# EAGLE board synchronizer v1.0 (EAGLE 6.5.0)
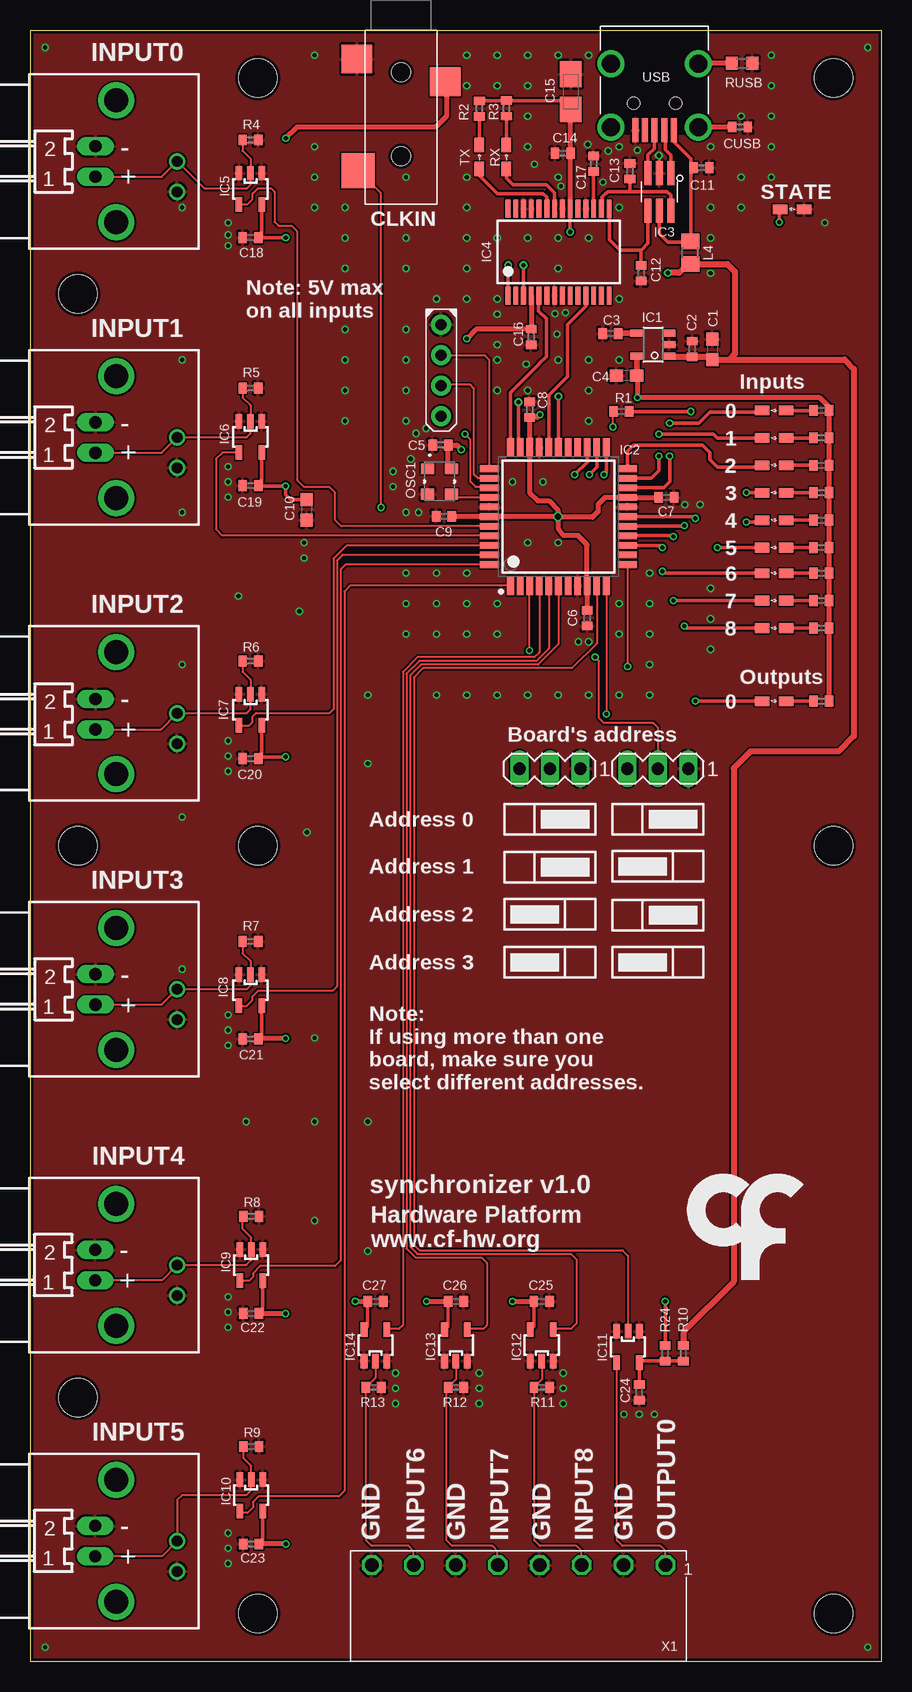
[diagram p0: board, top side]
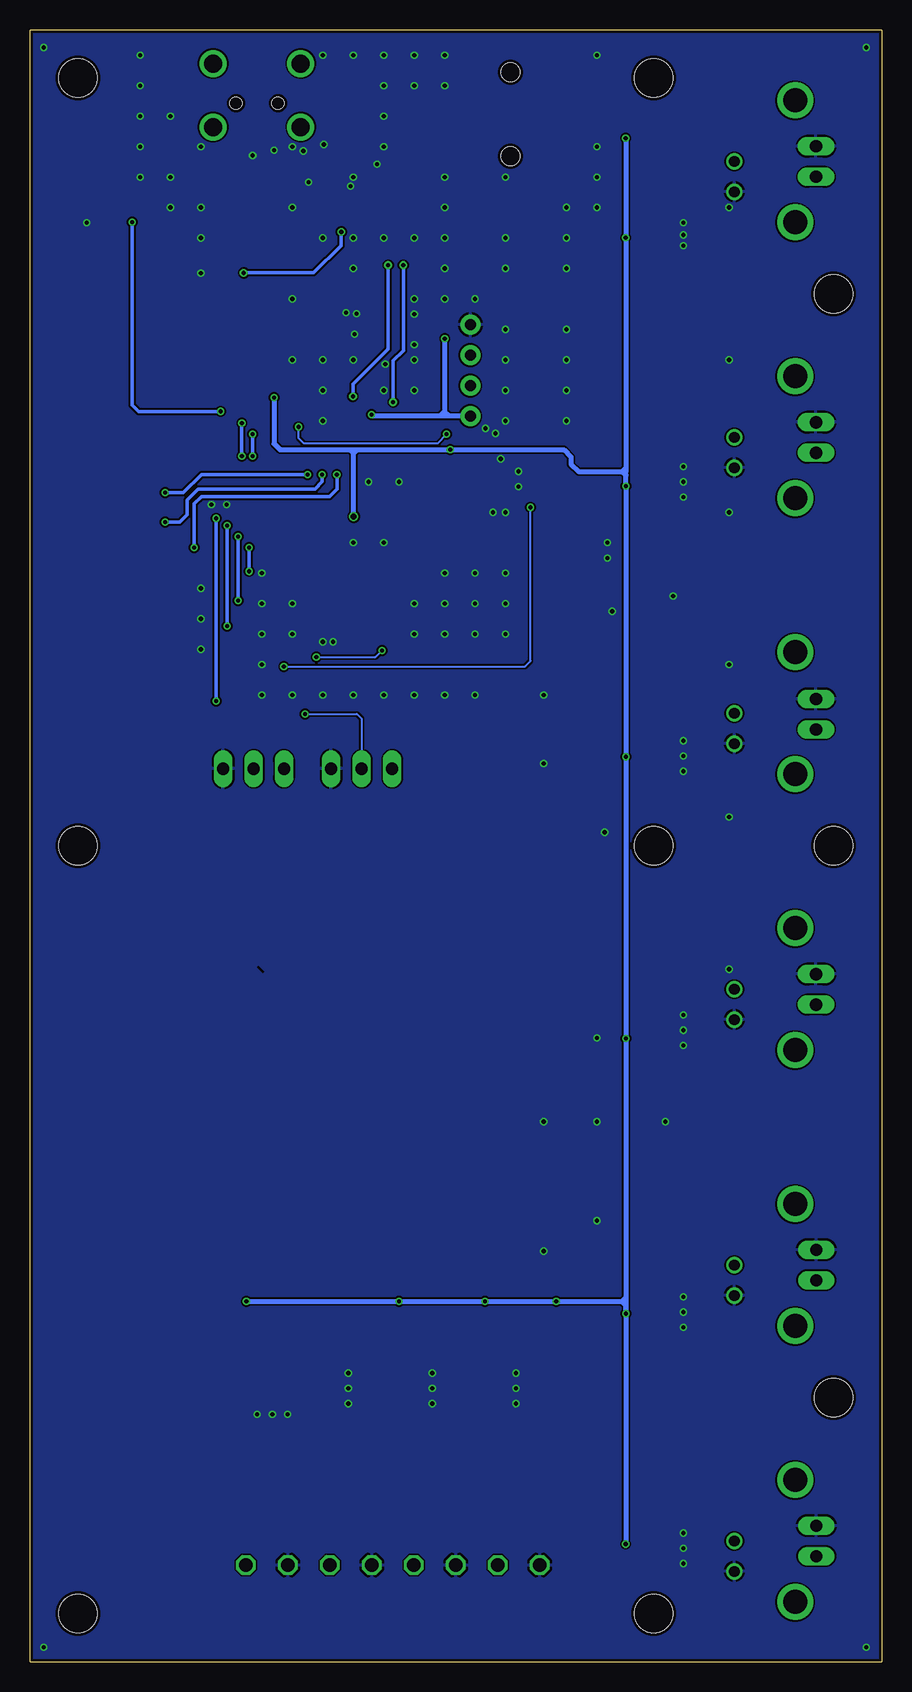
[diagram p1: board, bottom side, seen from below]

Size 71 x 136 mm. Coordinates in mm from the lower left corner, seen from the top.
Outline: 0,136 0,0 71,0 71,136 0,136
Copper layers (1*16): Top 0.018mm / dielectric 1.55mm / Bottom 0.018mm
Design rules "eC_2Layer_PClass6_BaseCopperO18_eCDefault *": minimum track width 0.15mm, minimum drill 0.35mm, track to track 0.15mm, track to pad 0.15mm, pad to pad 0.15mm, via to via 0.15mm, smd to smd 0mil, copper to edge 0.25mm, drill to drill 0.35mm, minimum pad ring 0.175mm, minimum via ring 0.125mm, stop-mask expansion 0mil, vias tented up to drill 0.45mm, thermal gap 0.2mm
Holes 3.2 mm at 4,114 4,68 67,132 67,68 19,132 19,68 4,22 67,4 19,4
bRestrict: 1 lines

## Footprints (pad centres in the part's own frame; a part is rotated, then mirrored left to right if it is on the bottom)
MA03-1 = drill 1.016 long: 1 -2.54,0; 2 0,0; 3 2.54,0
C0603 = smd 1.1 x 1: 1 -0.85,0; 2 0.85,0
C0402 = smd 0.7 x 0.9: 1 -0.65,0; 2 0.65,0
A/3216-18W = smd 2.15 x 1.8: + 1.475,0; - -1.475,0
35RASMT2BHNTRX = smd 2.4 x 2.55: 1 0.8,3.675; 5 -1.1,-3.675 | smd 2.9 x 2.75: 4 8.2,-3.575 | hole 1.6: 0,0; 7,0
BNC_RA = drill 0.9 pad 1.27: 1 0,-5.08; 2 -2.54,-5.08 | drill 2: P$1 -5.08,0; P$2 5.08,0
TSOT23-5 = smd 0.6 x 1.05: 1 -0.95,-1.354; 2 0,-1.354; 3 0.95,-1.354; 4 0.95,1.354; 5 -0.95,1.354
QFP80P1200X1200X120-44N = smd 1.55 x 0.55: 1 -5.75,4; 2 -5.75,3.2; 3 -5.75,2.4; 4 -5.75,1.6; 5 -5.75,0.8; 6 -5.75,0; 7 -5.75,-0.8; 8 -5.75,-1.6; 9 -5.75,-2.4; 10 -5.75,-3.2; 11 -5.75,-4; 23 5.75,-4; 24 5.75,-3.2; 25 5.75,-2.4; 26 5.75,-1.6; 27 5.75,-0.8; 28 5.75,0; 29 5.75,0.8; 30 5.75,1.6; 31 5.75,2.4; 32 5.75,3.2; 33 5.75,4 | smd 0.55 x 1.55: 12 -4,-5.75; 13 -3.2,-5.75; 14 -2.4,-5.75; 15 -1.6,-5.75; 16 -0.8,-5.75; 17 0,-5.75; 18 0.8,-5.75; 19 1.6,-5.75; 20 2.4,-5.75; 21 3.2,-5.75; 22 4,-5.75; 34 4,5.75; 35 3.2,5.75; 36 2.4,5.75; 37 1.6,5.75; 38 0.8,5.75; 39 0,5.75; 40 -0.8,5.75; 41 -1.6,5.75; 42 -2.4,5.75; 43 -3.2,5.75; 44 -4,5.75
SOT23-6L = smd 0.6 x 2: P$1 -0.95,-1.55; P$2 0,-1.55; P$3 0.95,-1.55; P$4 0.95,1.55; P$5 0,1.55; P$6 -0.95,1.55
SSOP28 = smd 0.4 x 1.5: 1 -4.225,-3.625; 2 -3.575,-3.625; 3 -2.925,-3.625; 4 -2.275,-3.625; 5 -1.625,-3.625; 6 -0.975,-3.625; 7 -0.325,-3.625; 8 0.325,-3.625; 9 0.975,-3.625; 10 1.625,-3.625; 11 2.275,-3.625; 12 2.925,-3.625; 13 3.575,-3.625; 14 4.225,-3.625; 15 4.225,3.625; 16 3.575,3.625; 17 2.925,3.625; 18 2.275,3.625; 19 1.625,3.625; 20 0.975,3.625; 21 0.325,3.625; 22 -0.325,3.625; 23 -0.975,3.625; 24 -1.625,3.625; 25 -2.275,3.625; 26 -2.925,3.625; 27 -3.575,3.625; 28 -4.225,3.625
SOT23-5 = smd 0.55 x 1.2: 1 -0.95,-1.3; 2 0,-1.3; 3 0.95,-1.3; 4 0.95,1.3; 5 -0.95,1.3
7395-02 = drill 1.016 long: 1 1.27,0; 2 -1.27,0
R0805 = smd 1.3 x 1.5: 1 -0.95,0; 2 0.95,0
OSCILLATOR_3.2X2.5 = smd 0.9 x 1.1: P$1 -1.05,-1; P$2 1.05,-1; P$3 1.05,1; P$4 -1.05,1
LED_HAND = smd 1.2 x 0.8: A -1,0; K 1,0
PDI_2.54_1X4 = drill 0.9 pad 1.676: P$1 -3.81,0; P$2 -1.27,0; P$3 1.27,0; P$4 3.81,0
R0402 = smd 0.7 x 0.9: 1 -0.65,0; 2 0.65,0
R0603 = smd 1 x 1.1: 1 -0.85,0; 2 0.85,0
240-0002-1 = smd 0.5 x 2: P$1 -1.6,8.65; P$2 -0.8,8.65; P$3 0,8.65; P$4 0.8,8.65; P$5 1.6,8.65 | drill 1.5: SHIELD_1 -3.65,3.1; SHIELD_2 3.65,3.1; SHIELD_3 3.65,8.4; SHIELD_4 -3.65,8.4 | hole 1: -1.75,6.4; 1.75,6.4
CON_3.5MM_1X8 = drill 1.1 octagon: P1 -12.25,0; P2 -8.75,0; P3 -5.25,0; P4 -1.75,0; P5 1.75,0; P6 5.25,0; P7 8.75,0; P8 12.25,0

## Placement (x,y rotation side)
A0  [MA03-1]  52.35,74.42 180 top
A1  [MA03-1]  43.35,74.42 180 top
C1  10uF  [C0603]  56.89,109.38 270 top
C2  100nF  [C0402]  55.21,109.41 270 top
C3  NA  [C0402]  48.41,110.7 0 top
C4  4.7uF  [C0603]  49.74,107.19 180 top
C5  100nF  [C0402]  34.22,101.4 180 top
C6  100nF  [C0402]  46.46,86.97 270 top
C7  100nF  [C0402]  53.05,97.04 0 top
C8  100nF  [C0402]  41.66,104.37 90 top
C9  330nF  [C0402]  34.52,95.46 180 top
C10  10uF  [C0603]  23.05,96.01 270 top
C11  100nF  [C0402]  56,124.52 0 top
C12  47pF  [C0402]  50.96,115.72 270 top
C13  47pF  [C0402]  50.02,124.23 90 top
C14  100nF  [C0402]  44.42,125.73 180 top
C15  4.7uF  [A/3216-18W]  45.09,130.85 270 top
C16  100nF  [C0402]  41.79,110.41 270 top
C17  100nF  [C0402]  47,124.86 90 top
C18  100nF  [C0402]  18.38,118.7 180 top
C19  100nF  [C0402]  18.38,98.02 180 top
C20  100nF  [C0402]  18.38,75.26 180 top
C21  100nF  [C0402]  18.38,51.9 180 top
C22  100nF  [C0402]  18.43,29.01 180 top
C23  100nF  [C0402]  18.43,9.8 180 top
C24  100nF  [C0402]  50.8,22.44 270 top
C25  100nF  [C0402]  42.67,30.01 0 top
C26  100nF  [C0402]  35.51,30.01 0 top
C27  100nF  [C0402]  28.8,30.01 0 top
CLKIN  [35RASMT2BHNTRX]  30.94,132.48 270 top
CTRL0.0  BNC  [BNC_RA]  7.2,125.05 90 top
CTRL0.1  BNC  [BNC_RA]  7.2,102.05 90 top
CTRL0.2  BNC  [BNC_RA]  7.2,79.05 90 top
CTRL0.3  BNC  [BNC_RA]  7.2,56.05 90 top
CTRL0.4  BNC  [BNC_RA]  7.2,33.05 90 top
CTRL0.5  BNC  [BNC_RA]  7.2,10.05 90 top
CUSB  4.7nF  [C0402]  59.2,127.91 0 top
IC1  TPS70933  [TSOT23-5]  51.95,109.77 90 top
IC2  ATXMEGAxxxA4U-AU  [QFP80P1200X1200X120-44N]  44.06,95.44 90 top
IC3  USBLC6-2SC6  [SOT23-6L]  52.48,122.5 180 top
IC4  FT232RL  [SSOP28]  44.07,117.49 0 top
IC5  SN74LVC1G240  [SOT23-5]  18.38,122.76 180 top
IC6  SN74LVC1G240  [SOT23-5]  18.38,102.09 180 top
IC7  SN74LVC1G240  [SOT23-5]  18.38,79.33 180 top
IC8  SN74LVC1G240  [SOT23-5]  18.38,55.96 180 top
IC9  SN74LVC1G240  [SOT23-5]  18.45,33.05 180 top
IC10  SN74LVC1G240  [SOT23-5]  18.45,13.86 180 top
IC11  SN74LVC1G240  [SOT23-5]  49.86,26.23 180 top
IC12  SN74LVC1G240  [SOT23-5]  42.67,26.36 0 top
IC13  SN74LVC1G240  [SOT23-5]  35.51,26.36 0 top
IC14  SN74LVC1G240  [SOT23-5]  28.8,26.36 0 top
IN0.0  [7395-02]  5.46,125.04 270 top
IN0.1  [7395-02]  5.46,102.02 270 top
IN0.2  [7395-02]  5.46,78.96 270 top
IN0.3  [7395-02]  5.46,56.02 270 top
IN0.4  [7395-02]  5.43,33.05 270 top
IN0.5  [7395-02]  5.43,10.05 270 top
L4  ???  [R0805]  55.05,117.43 90 top
OSC1  [OSCILLATOR_3.2X2.5]  34.14,98.37 270 top
OUT00  GREEN  [LED_HAND]  62.03,104.28 180 top
OUT01  GREEN  [LED_HAND]  62.03,102 180 top
OUT02  GREEN  [LED_HAND]  62.03,99.71 180 top
OUT03  GREEN  [LED_HAND]  62.03,97.43 180 top
OUT04  GREEN  [LED_HAND]  62.03,95.14 180 top
OUT05  GREEN  [LED_HAND]  62.03,92.85 180 top
OUT10  GREEN  [LED_HAND]  62.03,90.72 180 top
OUT11  GREEN  [LED_HAND]  62.03,88.43 180 top
OUT12  GREEN  [LED_HAND]  62.03,86.15 180 top
OUT13  GREEN  [LED_HAND]  62.03,80.05 180 top
PDI  PDI  [PDI_2.54_1X4]  34.28,107.63 270 top
R1  68  [R0402]  49.32,104.2 180 top
R2  2050  [R0402]  37.47,129.44 90 top
R3  680  [R0402]  39.72,129.46 90 top
R4  100k  [R0402]  18.38,126.83 0 top
R5  100k  [R0402]  18.38,106.15 0 top
R6  100k  [R0402]  18.38,83.39 0 top
R7  100k  [R0402]  18.38,60.02 0 top
R8  100k  [R0402]  18.45,37.11 0 top
R9  100k  [R0402]  18.45,17.92 0 top
R10  0  [R0402]  54.48,25.7 270 top
R11  100k  [R0402]  42.67,22.85 0 top
R12  100k  [R0402]  35.51,22.85 0 top
R13  100k  [R0402]  28.65,22.85 0 top
R14  68  [R0402]  65.99,104.28 0 top
R15  68  [R0402]  65.99,102 0 top
R16  68  [R0402]  65.99,99.71 0 top
R17  68  [R0402]  65.99,97.43 0 top
R18  68  [R0402]  65.99,95.14 0 top
R19  68  [R0402]  65.99,92.85 0 top
R20  68  [R0402]  65.99,90.72 0 top
R21  68  [R0402]  65.99,88.43 0 top
R22  68  [R0402]  65.99,86.15 0 top
R23  68  [R0402]  65.99,80.05 0 top
R24  0 NA  [R0402]  52.96,25.7 270 top
RUSB  1M  [R0603]  59.39,133.22 0 top
RX  GREEN  [LED_HAND]  39.72,125.41 270 top
STATE  GREEN  [LED_HAND]  63.55,121.05 0 top
TX  RED  [LED_HAND]  37.47,125.41 270 top
U$9  [LOGO_6]  57.96,37.56 0 top
USB  [240-0002-1]  52.08,136.31 180 top
X1  CON_3.5MM_1X8  [CON_3.5MM_1X8]  40.75,8.04 180 top

## Library data of the parts
A0 A1 = con-lstb; OC_FARNELL: unknown; OC_NEWARK: unknown
C1-C27 CUSB L4 R1-R24 RUSB = rcl
CLKIN CTRL0.0 CTRL0.1-CTRL0.5 PDI USB X1 = CNP-connectors
IC1 = CNP-ics 2
IC2 = xmega-a4
IC3 = CNP 2
IC4 = ftdichip; MPN: FT232RL; OC_FARNELL: 1146032; OC_NEWARK: 91K9918
IC5-IC14 = My_library 0v2
IN0.0 IN0.1-IN0.5 = con-molex; OC_FARNELL: 9731601; OC_NEWARK: unknown
OSC1 OUT00 OUT01-OUT05 OUT10-OUT13 RX STATE TX U$9 = CNP-miscellaneous

## Nets
A0: A0.2 IC2.3
A1: A1.2 IC2.11
CLK_SYNC: CLKIN.4 IC2.12
CTRL00: IC2.40 IC5.4
CTRL01: IC2.41 IC6.4
CTRL02: IC2.42 IC7.4
CTRL03: IC2.43 IC8.4
CTRL04: IC2.44 IC9.4
CTRL05: IC2.1 IC10.4
CTRL10: IC2.4 IC14.4
CTRL11: IC2.5 IC13.4
CTRL12: IC2.6 IC12.4
FT_CTS: IC2.29 IC4.11
FT_RTS: IC2.28 IC4.3
FT_RXD: IC2.33 IC4.5
FT_TXD: IC2.32 IC4.1
GND: A0.1 A1.1 C1.1 C2.1 C3.1 C4.2 C5.2 C6.2 C7.2 C8.2 C9.2 C10.2 C11.2 C12.2 C13.2 C14.2 C15.- C16.2 C17.2 C18.2 C19.2 C20.2 C21.2 C22.2 C23.2 C24.2 C25.2 C26.2 C27.2 CLKIN.5 CTRL0.0.2 CTRL0.1.2 CTRL0.2.2 CTRL0.3.2 CTRL0.4.2 CTRL0.5.2 CUSB.2 IC1.2 IC2.8 IC2.18 IC2.30 IC2.38 IC3.P$2 IC4.7 IC4.18 IC4.21 IC4.25 IC4.26 IC5.1 IC5.3 IC6.1 IC6.3 IC7.1 IC7.3 IC8.1 IC8.3 IC9.1 IC9.3 IC10.1 IC10.3 IC11.1 IC11.3 IC12.1 IC12.3 IC13.1 IC13.3 IC14.1 IC14.3 IN0.0.2 IN0.1.2 IN0.2.2 IN0.3.2 IN0.4.2 IN0.5.2 OSC1.P$2 PDI.P$1 R4.2 R5.2 R6.2 R7.2 R8.2 R9.2 R11.2 R12.2 R13.2 RUSB.2 STATE.K USB.P$5 X1.P2 X1.P4 X1.P6 X1.P8
N$1: CTRL0.1.1 IC6.2 IN0.1.1 R5.1
N$2: CTRL0.2.1 IC7.2 IN0.2.1 R6.1
N$3: CTRL0.3.1 IC8.2 IN0.3.1 R7.1
N$4: IC11.4 X1.P1
N$5: IC12.2 R11.1 X1.P3
N$6: IC13.2 R12.1 X1.P5
N$7: IC14.2 R13.1 X1.P7
N$8: CTRL0.4.1 IC9.2 IN0.4.1 R8.1
N$9: OUT00.A R14.1
N$10: OUT01.A R15.1
N$11: OUT02.A R16.1
N$12: OUT03.A R17.1
N$13: OUT04.A R18.1
N$14: OUT05.A R19.1
N$15: OUT10.A R20.1
N$16: OUT11.A R21.1
N$18: OUT12.A R22.1
N$19: OUT13.A R23.1
N$20: C24.1 IC11.5 R10.2 R24.2
N$22: CTRL0.5.1 IC10.2 IN0.5.1 R9.1
N$23: R1.1 STATE.A
N$26: CTRL0.0.1 IC5.2 IN0.0.1 R4.1
N$32: C3.2 IC1.4
N$38: C17.1 IC4.17
N$39: C11.1 IC3.P$5 L4.2 USB.P$1
N$40: IC3.P$1 USB.P$2
N$47: R3.1 RX.A
N$48: IC4.23 TX.K
N$49: IC4.22 RX.K
N$50: IC3.P$3 USB.P$3
N$59: CUSB.1 USB.SHIELD_4
N$61: RUSB.1 USB.SHIELD_1
N$62: R2.1 TX.A
OSC1: IC2.37 OSC1.P$3
OUT00: IC2.20 OUT00.K
OUT01: IC2.21 OUT01.K
OUT02: IC2.22 OUT02.K
OUT03: IC2.23 OUT03.K
OUT04: IC2.24 OUT04.K
OUT05: IC2.25 OUT05.K
OUT10: IC2.14 OUT10.K
OUT11: IC2.15 OUT11.K
OUT12: IC2.16 OUT12.K
OUT13: IC2.17 OUT13.K
OUTPUT00: IC2.10 IC11.2
PDI-CLK: IC2.35 PDI.P$3
PDI-DATA: IC2.34 PDI.P$2
STATE: IC2.36 R1.2
USB5V: C1.2 C2.2 C14.1 C15.+ IC1.1 IC4.20 L4.1 R2.2 R3.2 R10.1
USBDM: C13.1 IC3.P$6 IC4.16
USBDP: C12.1 IC3.P$4 IC4.15
VCCIO: C4.1 C5.1 C6.1 C7.1 C8.1 C9.1 C10.1 C16.1 C18.1 C19.1 C20.1 C21.1 C22.1 C23.1 C25.1 C26.1 C27.1 CLKIN.1 IC1.5 IC2.9 IC2.19 IC2.31 IC2.39 IC4.4 IC5.5 IC6.5 IC7.5 IC8.5 IC9.5 IC10.5 IC12.5 IC13.5 IC14.5 OSC1.P$4 PDI.P$4 R14.2 R15.2 R16.2 R17.2 R18.2 R19.2 R20.2 R21.2 R22.2 R23.2 R24.1

## Tracks (layer width: path | path; a pad name or v marks a point on that pad's centre or on a via)
A0  (via drill 0.35 pad 0.6)
  Top 0.152: A0.2 52.35,77.84 51.97,78.22 47.85,78.22 47.45,78.63 47.45,83.41 v47.12,83.73 | v41.66,84.27 IC2.3
  Bottom 0.152: v47.12,83.73 42.19,83.73 v41.66,84.27
A1  (via drill 0.35)
  Top 0.152: IC2.11 v48.06,78.98
  Bottom 0.152: v48.06,78.98 43.74,78.98 43.35,78.6 A1.2
CLK_SYNC  (via drill 0.35)
  Top 0.152: IC2.12 49.81,82.97 v49.84,82.95 | v29.26,96.21 29.26,122.38 CLKIN.4
  Bottom 0.152: v49.84,82.95 29.72,82.95 29.26,83.41 v29.26,96.21
CTRL00
  Top 0.152: IC5.4 18.13,121.46 18.56,121.9 18.56,122.36 19.02,122.81 20.09,122.81 20.39,122.51 20.39,120.01 20.73,119.68 21.79,119.68 22.25,119.22 22.25,98.49 22.86,97.88 24.99,97.88 25.45,97.43 25.45,95.14 25.95,94.64 IC2.40
CTRL01
  Top 0.152: IC6.4 16.04,100.79 15.51,100.26 15.51,94.38 16.04,93.86 38.33,93.86 IC2.41
CTRL02
  Top 0.152: IC7.4 18.28,78.03 18.56,78.31 18.56,78.77 18.87,79.07 24.99,79.07 25.3,79.38 25.3,91.94 26.4,93.04 IC2.42
CTRL03
  Top 0.152: IC8.4 18.08,54.66 18.56,55.15 18.56,55.45 19.02,55.91 25.23,55.91 25.6,56.28 25.6,91.79 26.05,92.24 IC2.43
CTRL04
  Top 0.152: IC2.44 26.32,91.44 25.91,91.03 25.91,33.42 25.45,32.96 19.2,32.96 18.59,32.35 18.59,32.05 18.29,31.74 IC9.4
CTRL05
  Top 0.152: IC2.1 26.7,89.69 26.21,89.2 26.21,14.21 25.76,13.76 19.05,13.76 18.59,13.3 18.59,12.84 18.14,12.39 17.67,12.39 IC10.4
CTRL10
  Top 0.152: IC2.4 42.46,84.11 42.06,83.71 32.31,83.71 31.09,82.49 31.09,28.03 30.79,27.73 29.82,27.73 IC14.4
CTRL11
  Top 0.152: IC2.5 43.26,84.45 42.22,83.41 32.46,83.41 31.39,82.34 31.39,34.43 32.16,33.67 37.64,33.67 38.1,33.21 38.1,28.03 37.8,27.73 36.53,27.73 IC13.4
CTRL12
  Top 0.152: IC2.6 44.06,84.79 42.37,83.1 32.61,83.1 31.7,82.19 31.7,34.59 32.31,33.98 45.11,33.98 45.57,33.52 45.57,28.18 45.11,27.73 43.69,27.73 IC12.4
FT_CTS
  Top 0.305: IC4.11 46.35,112.96 44.82,111.44 44.82,107.12 43.26,105.56 IC2.29
FT_RTS  (via drill 0.35 pad 0.65)
  Top 0.305: v41.14,116.39 IC4.3 | v44.07,105.46 44.07,101.2 IC2.28
  Bottom 0.305: v44.07,105.46 44.07,106.47 41.14,109.41 v41.14,116.39
FT_RXD
  Top 0.305: IC4.5 42.41,113.82 42.41,112.58 43.05,111.95 43.05,108.77 42.45,108.18 42.45,108.16 40.06,105.78 IC2.33
  Top 0.406: 42.45,113.85 IC4.5
FT_TXD  (via drill 0.35 pad 0.65)
  Top 0.305: v39.87,116.39 39.87,113.88 | v40.72,104.98 40.72,101.33 IC2.32
  Top 0.406: 39.87,113.88 IC4.1
  Bottom 0.305: v40.72,104.98 40.72,108.43 39.87,109.28 v39.87,116.39
GND  (via drill 0.35, 0.35 pad 0.65)
  Top 0.305: 53.27,109.73 IC1.2 | IC3.P$2 52.48,125.5 v52.44,125.54
  Top 0.406: IC2.8
  other vias: 23.72,133.9 36.42,133.9 36.42,121.2 23.72,121.2 12.7,121.2 12.7,108.5 49.12,108.5 61.82,133.9 12.7,83.1 12.7,95.8 12.7,70.4 12.7,57.7 31.34,95.8 41.5,93.26 44.04,93.26 51.66,90.72 51.66,88.18 51.66,85.64 36.42,90.72 33.88,90.72 31.34,90.72 31.34,88.18 33.88,88.18 36.42,88.18 38.96,88.18 49.12,88.18 49.12,85.64 38.96,85.64 36.42,85.64 33.88,85.64 31.34,85.64 51.66,80.56 51.66,83.1 49.12,80.56 46.58,103.42 31.34,103.42 31.34,108.5 38.96,108.5 38.96,105.96 41.5,105.96 44.04,108.5 46.58,108.5 46.58,105.96 41.5,118.66 44.04,116.12 38.96,118.66 36.42,118.66 36.42,116.12 36.42,113.58 38.96,113.58 49.12,113.58 56.74,115.74 56.74,118.66 56.74,121.2 49.12,121.2 46.58,118.66 44.04,118.66 36.42,123.74 44.04,123.74 41.5,126.28 41.5,128.82 46.51,126.46 49.12,126.28 41.5,131.36 38.96,131.36 36.42,131.36 38.96,133.9 41.5,133.9 46.58,133.9 44.04,133.9 61.82,131.36 59.28,128.82 61.82,128.82 61.82,126.28 59.28,123.74 56.74,126.28 61.82,123.74 59.28,121.2 46.58,85 22.86,93.26 22.86,91.99 16.51,98.34 16.51,118.91 16.51,75.48 16.51,52.62 42.77,98.34 40.23,98.34 46.58,80.56 44.04,80.56 41.5,80.56 56.74,89.45 56.74,86.91 31.34,105.96 31.34,111.04 33.88,113.58 26.26,103.42 26.26,105.96 26.26,108.5 26.26,111.04 26.26,116.12 26.26,118.66 26.26,121.2 31.34,116.12 31.34,118.66 31.34,123.74 23.72,123.74 23.72,126.28 16.51,74.21 16.51,76.75 16.51,97.07 16.51,99.61 16.51,119.93 16.51,118.03 16.51,53.89 16.51,51.35 16.51,30.39 16.51,29.12 16.51,27.86 16.51,10.71 16.51,9.44 16.51,8.17 30.48,24.05 30.48,22.77 30.48,21.5 37.47,21.5 37.47,22.77 37.47,24.05 44.45,21.5 44.45,22.77 44.45,24.05 45.72,85 32.38,95.8 54.61,96.44 55.88,96.44 33.02,102.78 31.75,100.25 32.18,102.38 30.28,97.93 30.28,99.2 41.38,108.14 38.96,109.77 38.96,112.31 43.76,112.36 44.65,112.44 43.94,110.63 44.27,122.98 50.65,125.98 47.78,123.31 48.21,125.92 42.06,124.81 1.27,1.19 69.85,1.19 69.85,134.53 1.27,134.53 28.17,80.56 28.17,74.84 28.17,45 28.17,34.2 23.72,45 23.72,51.98 23.72,36.74 18.01,45 17.37,88.81 22.45,87.55 23.09,69.13 36.42,80.56 66.27,119.93 38.96,80.56 33.88,80.56 56.74,84.37 52.07,20.62 50.8,20.62 49.53,20.62
  pour Bottom: 0,0 71,0 71,136 0,136
  pour Top: 0,0 71,0 71,136 0,136
N$1
  Top 0.152: R5.1 17.73,105.36 18.38,104.71 IC6.2 18.41,103.35 18.41,102.39 18.07,102.05 CTRL0.1.1 10.98,100.75 IN0.1.1
N$2
  Top 0.152: R6.1 17.73,82.5 18.38,81.85 IC7.2 18.41,80.59 18.41,79.38 18.08,79.05 CTRL0.2.1 10.92,77.69 IN0.2.1
N$3
  Top 0.152: R7.1 17.73,59.03 18.38,58.38 IC8.2 18.41,57.23 18.41,56.37 18.09,56.05 CTRL0.3.1 10.99,54.75 IN0.3.1
N$4
  Top 0.152: X1.P1 53,9.22 52.58,9.64 49.38,9.64 48.92,10.1 IC11.4
N$5
  Top 0.152: IC12.2 42.67,23.5 R11.1 42.06,22.81 42.06,10.1 42.52,9.64 45.57,9.64 46,9.21 X1.P3
N$6
  Top 0.152: IC13.2 35.51,23.5 R12.1 34.75,22.74 34.75,10.1 35.2,9.64 38.56,9.64 39,9.2 X1.P5
N$7
  Top 0.152: IC14.2 28.8,23.65 R13.1 28.04,22.81 28.04,10.1 28.5,9.64 31.55,9.64 32,9.19 X1.P7
N$8
  Top 0.152: R8.1 17.74,37.06 17.74,36.06 18.45,35.35 IC9.2 18.45,33.46 18.04,33.05 CTRL0.4.1 11.01,31.78 IN0.4.1
N$9
  Top 0.305: OUT00.A R14.1
N$10
  Top 0.305: R15.1 OUT01.A
N$11
  Top 0.305: OUT02.A R16.1
N$12
  Top 0.305: OUT03.A R17.1
N$13
  Top 0.305: OUT04.A R18.1
N$14
  Top 0.305: OUT05.A R19.1
N$15
  Top 0.305: OUT10.A R20.1
N$16
  Top 0.305: R21.1 OUT11.A
N$18
  Top 0.305: OUT12.A R22.1
N$19
  Top 0.305: R23.1 OUT13.A
N$20
  Top 0.305: C24.1 50.81,23.11 IC11.5 50.93,25.05 R24.2 R10.2
N$22
  Top 0.152: R9.1 17.8,16.95 18.45,16.3 IC10.2 18.45,14.29 18.02,13.86 12.67,13.86 12.28,13.46 CTRL0.5.1 11.01,8.78 IN0.5.1
N$23  (via drill 0.35)
  Top 0.305: R1.1 v55.09,104.2 v55.09,104.21 | v62.48,119.98 62.48,120.99 STATE.A
  Bottom 0.305: v55.09,104.21 61.95,104.21 62.48,104.74 v62.48,119.98
N$26
  Top 0.152: R4.1 17.73,125.94 18.38,125.28 IC5.2 18.41,124.03 18.41,123.12 18.05,122.76 14.57,122.76 CTRL0.0.1 11,123.77 IN0.0.1
N$32
  Top 0.152: 48.98,110.73 C3.2
  Top 0.457: IC1.4 49.08,110.72 C3.2
N$38
  Top 0.305: IC4.17 47,123.91 C17.1
N$39
  Top 0.305: IC3.P$5 52.48,119.02 53.21,118.3 54.48,118.3 55.11,118.93 | 55.11,118.93 55.11,124.65 | 55.11,124.65 55.11,125.28 53.61,126.78 53.62,127.61 USB.P$1 | C11.1 55.24,124.52 55.11,124.65 | 55.11,118.93 55.11,118.45 L4.2
N$40
  Top 0.305: 52.9,127.63 USB.P$2 52.96,127.57 52.96,126.02 53.43,125.55 IC3.P$1
N$47
  Top 0.305: RX.A R3.1
N$48
  Top 0.305: IC4.23 43.1,122.05 42.79,122.36 38.98,122.36 37.46,123.89 37.46,124.4 TX.K
N$49
  Top 0.305: IC4.22 43.75,122.42 43.05,123.12 40.25,123.12 39.74,123.63 39.74,124.39 RX.K
N$50
  Top 0.305: 52.05,127.63 USB.P$3 52.06,127.64 52.06,126.12 51.53,125.59 IC3.P$3
N$59
  Top 0.406: CUSB.1 USB.SHIELD_4
N$61
  Top 0.406: RUSB.1 55.74,133.22 USB.SHIELD_1
N$62
  Top 0.305: TX.A R2.1
OSC1
  Top 0.152: IC2.37 35.42,97.04 OSC1.P$3
OUT00  (via drill 0.35)
  Top 0.305: IC2.20 52.84,97.84 53.34,98.34 v53.34,100.47 | v53.34,103.22 55.78,103.22 56.69,104.13 60.87,104.13 OUT00.K
  Bottom 0.305: v53.34,100.47 v53.34,103.22
OUT01  (via drill 0.35)
  Top 0.305: IC2.21 51.81,98.64 52.43,99.25 v52.43,100.47 | v52.43,102.3 57,102.3 57.3,102 OUT01.K
  Bottom 0.305: v52.43,100.47 v52.43,102.3
OUT02
  Top 0.305: IC2.22 49.81,100.91 50.29,101.39 56.08,101.39 56.69,100.78 56.69,100.17 57.3,99.56 60.87,99.56 OUT02.K
OUT03  (via drill 0.35)
  Top 0.305: IC2.23 48.06,99.16 v47.85,98.95 | v59.74,97.43 OUT03.K
  Bottom 0.305: v47.85,98.95 56.69,98.95 58.22,97.43 v59.74,97.43
OUT04  (via drill 0.35)
  Top 0.305: IC2.24 47.26,99.58 v46.63,98.95 | v59.74,94.99 60.87,94.99 OUT04.K
  Bottom 0.305: v46.63,98.95 46.63,98.34 47.24,97.73 57,97.73 57.91,96.82 57.91,95.6 58.52,94.99 v59.74,94.99
OUT05  (via drill 0.35)
  Top 0.305: IC2.25 46.46,100 v45.41,98.95 | v57.3,92.85 OUT05.K
  Bottom 0.305: v45.41,98.95 45.41,97.73 46.02,97.12 56.69,97.12 57.3,96.51 v57.3,92.85
OUT10  (via drill 0.35)
  Top 0.305: IC2.14 52.55,93.04 arc-90 v52.73,92.85 | v52.73,90.87 52.88,90.72 OUT10.K
  Bottom 0.305: v52.73,92.85 v52.73,90.87
OUT11  (via drill 0.35)
  Top 0.305: IC2.15 53.58,93.84 arc-90 v53.65,93.77 | v53.65,88.43 OUT11.K
  Bottom 0.305: v53.65,93.77 v53.65,88.43
OUT12  (via drill 0.35)
  Top 0.305: IC2.16 54.52,94.64 v54.56,94.68 | v54.56,86.3 54.71,86.15 OUT12.K
  Bottom 0.305: v54.56,94.68 v54.56,86.3
OUT13  (via drill 0.35)
  Top 0.305: IC2.17 55.47,95.44 v55.47,95.29 | v55.47,80.05 OUT13.K
  Bottom 0.305: v55.47,95.29 v55.47,80.05
OUTPUT00
  Top 0.152: IC2.10 47.26,84.87 45.19,82.8 32.77,82.8 32,82.03 32,34.74 32.46,34.28 49.4,34.28 49.86,33.82 IC11.2
PDI-CLK
  Top 0.152: IC2.35 37.34,98.64 37.03,98.95 37.03,106.11 36.73,106.42 34.34,106.42 PDI.P$3
PDI-DATA
  Top 0.152: IC2.34 38.31,108.49 37.95,108.86 34.33,108.86 PDI.P$2
STATE  (via drill 0.35)
  Top 0.152: IC2.36 38.1,97.84 38.1,97.88 37.19,97.88 36.73,98.34 36.73,101.84 v36.27,102.3 | v48.62,102.91 48.62,104.1 R1.2
  Bottom 0.152: v36.27,102.3 37.03,101.54 48.16,101.54 48.62,102 v48.62,102.91
USB5V  (via drill 0.35 pad 0.65)
  Top 0.305: 45.05,123.63 C14.1 | v45.04,119.16 IC4.20 | L4.1 54.87,116.48 | R2.2 37.5,130.11 R3.2 39.73,130.1 44.94,130.1 45.08,130.24 45.08,129.38 C15.+
  Top 0.406: IC4.20 45.05,123.63 45.05,129.33 C15.+
  Top 0.508: v53.18,115.76 54.15,115.76 54.87,116.48 58.16,116.48 58.78,115.87 58.78,109.01 58.29,108.53 | IC1.1 53.3,108.76 C2.2 56.65,108.76 C1.2 58.29,108.53 | 58.29,108.53 67.92,108.53 68.71,107.74 68.71,77.13 67.44,75.86 60.07,75.86 58.67,74.46 58.67,31.66 54.48,27.47 R10.1
  Top 0.813: 56.9,108.54 C1.2
  Bottom 0.305: v53.18,115.76 47.35,115.76 45.05,118.03 45.05,119.15 v45.04,119.16
USBDM
  Top 0.305: IC4.16 47.71,121.17 47.71,122.06 48.04,122.39 48.05,122.39 48.2,122.54 50.03,122.54 | IC3.P$6 53.43,122.22 53.12,122.54 50.03,122.54 | C13.1 50.02,122.55 50.03,122.54
USBDP
  Top 0.305: IC4.15 48.3,118.54 49.18,117.66 50.95,117.66 | IC3.P$4 51.53,118.22 50.97,117.66 50.95,117.66 | C12.1 50.96,117.65 50.95,117.66
VCCIO  (via drill 0.35, 0.5)
  Top 0.305: IC1.5 50.59,108.89 | v21.33,118.7 C18.1 19.33,118.7 IC5.5 | v21.33,118.7 | C20.1 19.03,75.42 19.33,75.42 | 19.33,75.42 v21.31,75.42 | IC6.5 19.33,98.02 C19.1 19.03,97.97 v21.31,97.97 21.31,97.27 21.72,96.86 C10.1 | 19.33,75.42 IC7.5 | C21.1 19.33,51.9 IC8.5 | IC9.5 19.4,29.33 C22.1 | IC10.5 19.4,9.96 C23.1 | C27.1 28.15,27.96 IC14.5 | C26.1 34.86,27.96 IC13.5 | C25.1 42.02,27.96 IC12.5 | R24.1 v52.96,30.01
  Top 0.406: C6.1 IC2.9 | IC2.9 | C7.1 IC2.19 47.96,97.04 47.37,96.45 47.37,95.84 46.91,95.38 44.17,95.38 44.01,95.53 | C7.1 | IC4.4 41.8,111.07 C16.1 37.21,111.06 v36.42,110.28 | 44.01,95.53 44.01,95.99 43.25,96.75 42.34,96.75 41.66,97.43 IC2.31 C8.1 42.31,103.72 v42.52,103.93 | 44.01,95.53 44.07,95.44 | 44.07,95.44 v44.01,95.44 IC2.39 35.19,95.44 C9.1 | IC2.9 46.45,93.09 45.69,93.86 44.47,93.86 44.07,94.41 44.07,95.44 | C4.1 50.62,107.16 arc-90 50.65,107.13 v50.65,105.35 65.84,105.35 66.64,104.55 R14.2 R15.2 R16.2 R17.2 R18.2 R19.2 R20.2 R21.2 R22.2 R23.2 | v35.97,101.02 35.58,101.4 C5.1 34.87,99.42 OSC1.P$4 | CLKIN.1 34.75,131.68 34.75,128.82 33.83,127.91 22.25,127.91 v21.33,126.99 | 19.42,12.54 IC10.5 | v21.31,51.95 19.08,51.95 C21.1 | v21.34,9.8 C23.1 | C22.1 21.29,29.01 v21.31,29 | v40.23,30.01 C25.1 | v33.07,30.01 C26.1 | v27.13,30.01 C27.1
  Top 0.457: 50.59,108.89 C4.1
  Bottom 0.305: v21.33,118.7 21.31,118.67
  Bottom 0.406: v44.01,95.44 44.01,100.71 | 21.31,118.67 21.31,99.5 | 21.31,99.5 21.31,99.19 | 21.31,98.89 v21.31,97.97 v21.31,75.42 v21.31,51.95 v21.31,29 | 21.31,98.89 21.31,99.19 | 21.61,99.19 25.28,99.19 25.88,99.79 25.88,100.41 26.49,101.02 v35.97,101.02 43.71,101.02 | 21.61,99.19 21.31,99.19 | 21.31,99.5 21.61,99.19 | 21.61,99.19 21.31,98.89 | 44.32,101.02 50.15,101.02 50.65,101.52 v50.65,105.35 | 44.32,101.02 43.71,101.02 | 43.71,101.02 44.01,100.71 | 44.01,100.71 44.32,101.02 | PDI.P$4 36.42,103.82 | 36.42,103.82 42.41,103.82 v42.52,103.93 | v36.42,110.28 36.42,104.18 | 36.42,104.18 36.42,103.82 | 36.42,104.18 36.12,103.88 36.73,103.88 36.42,104.18 | v21.33,126.99 v21.33,118.7 | v21.31,29 21.31,30.32 21.61,30.01 21.64,30.01 | v21.31,29 21.31,9.83 v21.34,9.8 | v52.96,30.01 v40.23,30.01 v33.07,30.01 v27.13,30.01 21.64,30.01 | 21.34,29.71 21.64,30.01

## Text on the board
tPlace: INPUT0 | - | + | Note: 5V max / on all inputs | INPUT1 | Inputs | 0 | - | 1 | + | 2 | 3 | 4 | 5 | 6 | 7 | INPUT2 | 8 | Outputs | - | 0 | + | Board's address | Address 0 | Address 1 | INPUT3 | Address 2 | Address 3 | - | + | Note: / If using more than one / board, make sure you / select different addresses. | INPUT4 | synchronizer v1.0 | Hardware Platform | www.cf-hw.org | - | + | INPUT5 | - | GND | INPUT6 | GND | INPUT7 | GND | INPUT8 | GND | OUTPUT0 | +